# Altium PCB MT2492_PCB.PcbDoc
Units mm, origin at the board's own origin, x right, y up, seen from the top; angles counter-clockwise.
Board outline 36 x 20.7 mm, 2 copper layers (Top Layer, Bottom Layer); 15 components, 9 nets, 34 pads, 10 vias.
Unrouted connection lines stored in the file: 25.
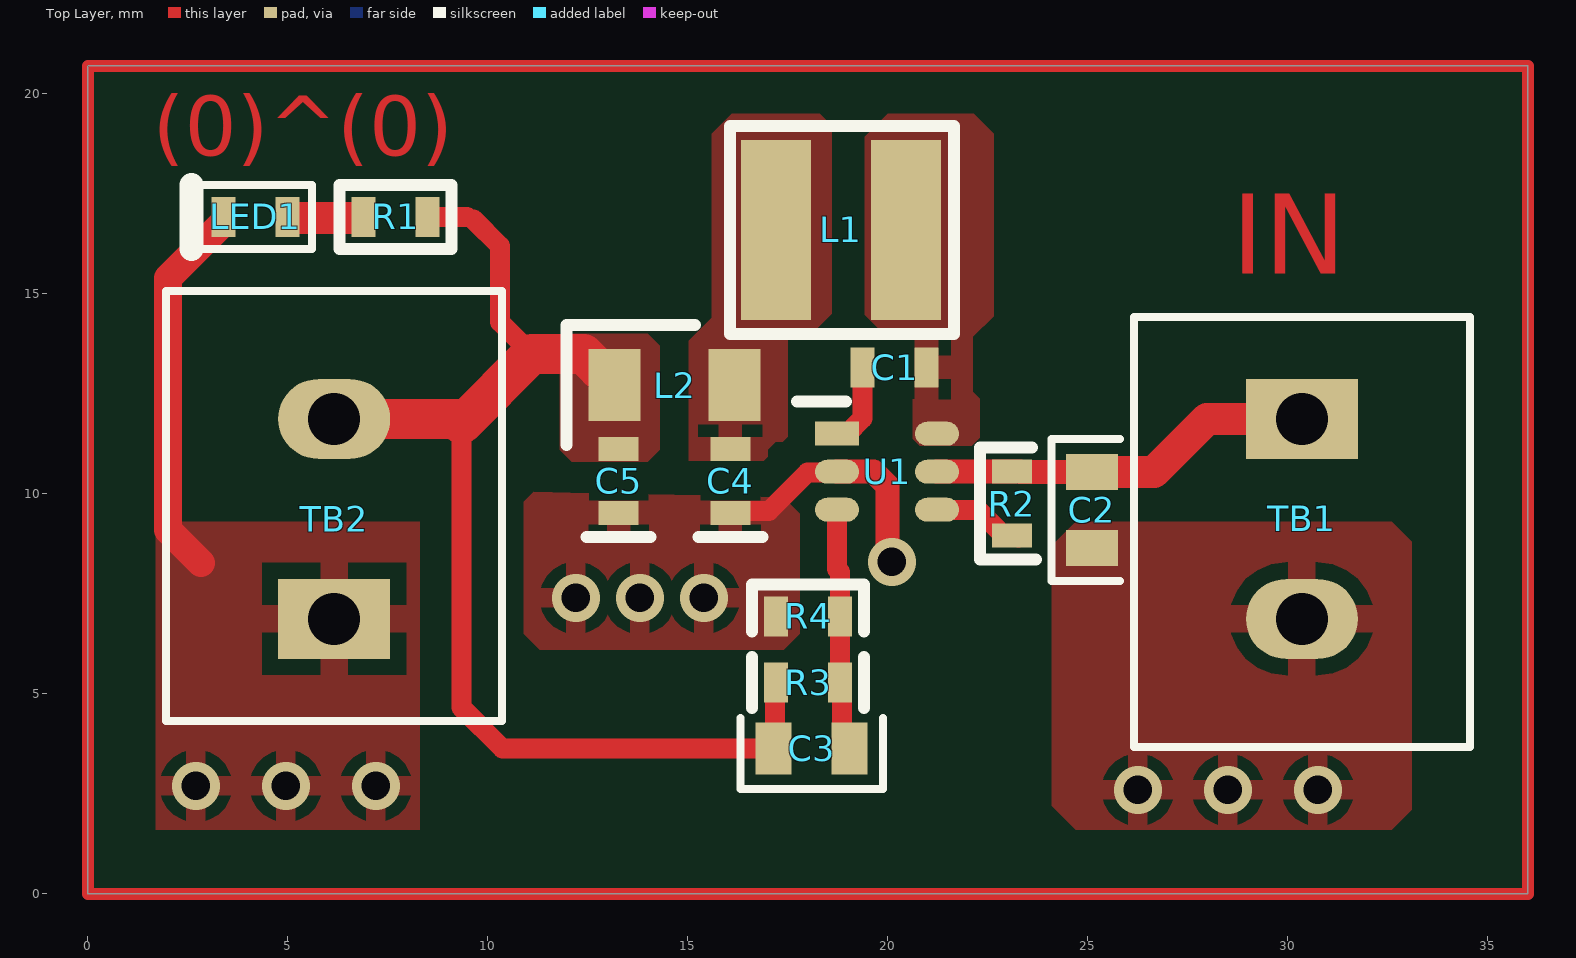
[diagram p0: Top Layer view]
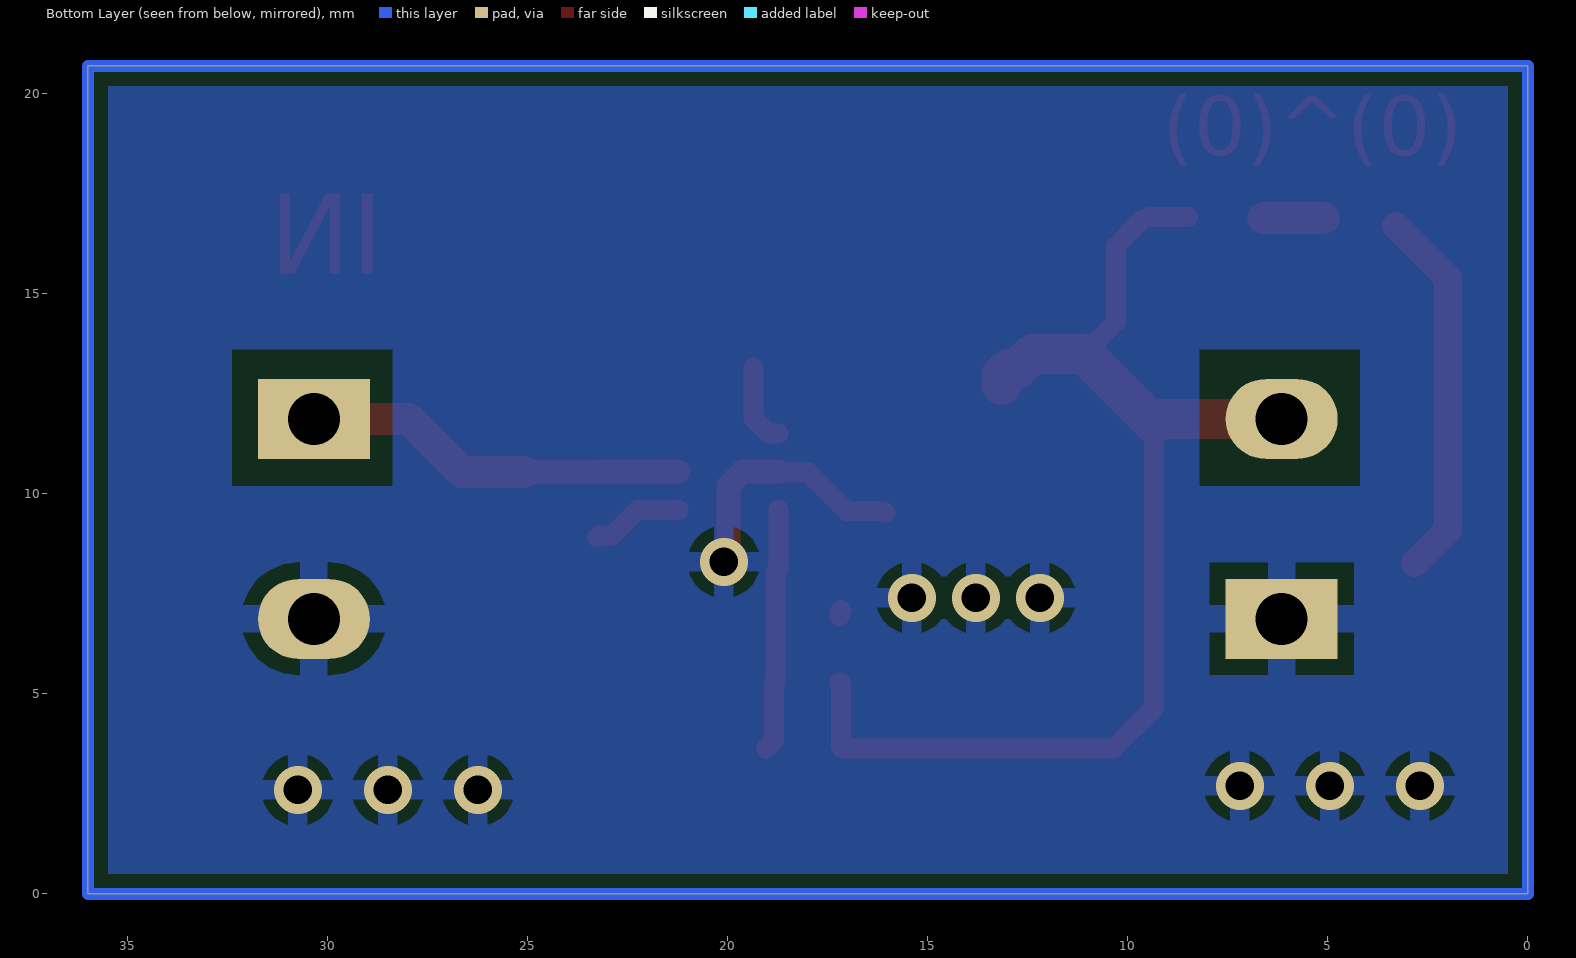
[diagram p1: Bottom Layer view, seen from below]
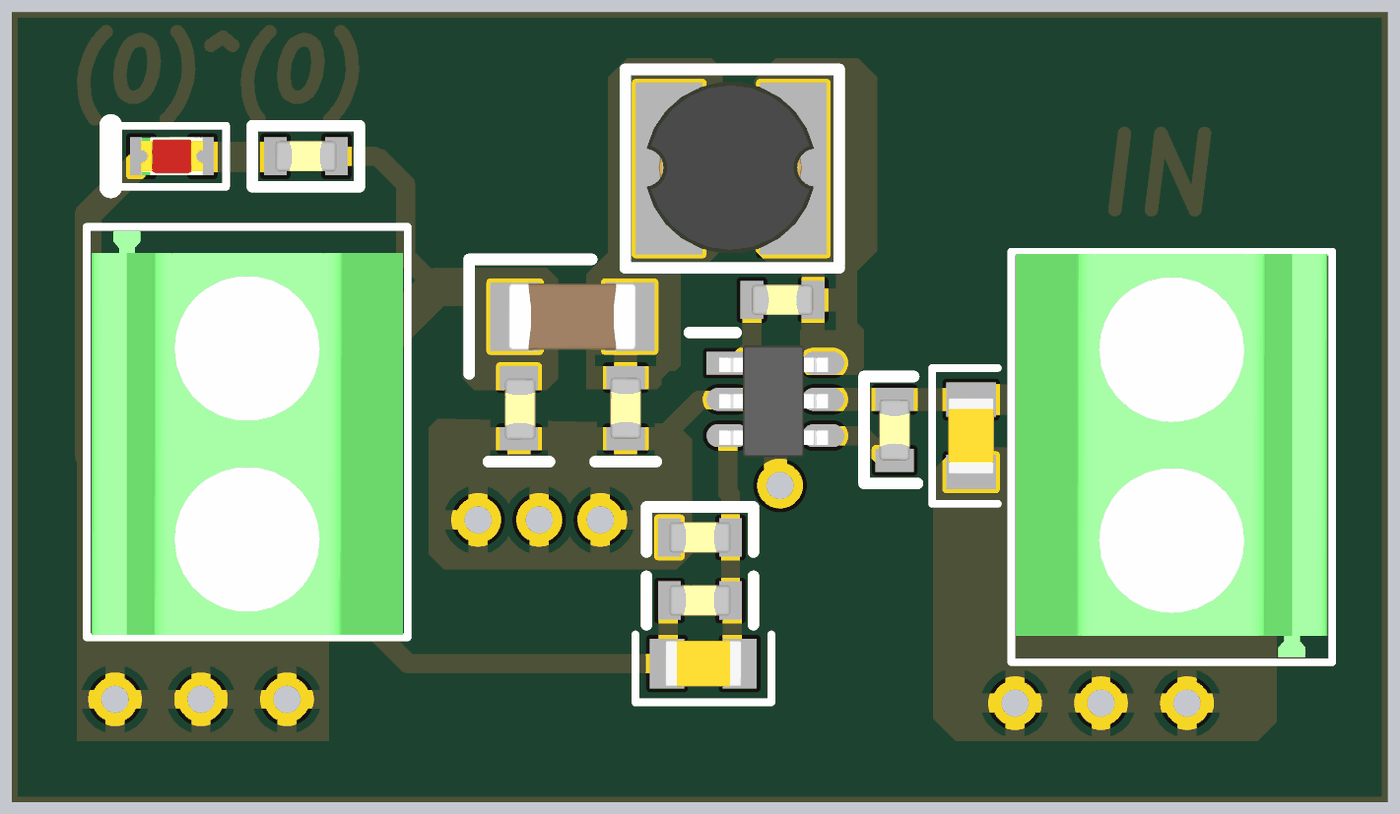
[diagram p2: 3D render of the assembled board from above, using the file's embedded part models]

## Layer stack, top to bottom
Top Solder: solder mask 0.0102, Solder Resist, Dk 3.5
Top Layer: signal copper 0.0356
Dielectric 1: dielectric 0.32, FR-4, Dk 4.8
Bottom Layer: signal copper 0.0356
Bottom Solder: solder mask 0.0102, Solder Resist, Dk 3.5

## Board outline
0,0 36,0 36,20.7 0,20.7

## Design rules (kind name [scope] priority, off if disabled: settings)
BoardOutlineClearance [All] p1: gap=0.5 ignorepadtopadclearanceinfootprint=FALSE
Clearance [All] p1: gap=0.3 ignorepadtopadclearanceinfootprint=FALSE
PolygonConnect [All] p1: thpad.connectstyle=Relief thpad.reliefconductorwidth=0.7 thpad.reliefentries=4 thpad.polygonreliefangle="90 Angle" thpad.airgapwidth=0.4 smdpad.connectstyle=Direct smdpad.reliefconductorwidth=0.254 smdpad.reliefentries=4 smdpad.polygonreliefangle="90 Angle" smdpad.airgapwidth=0.254 via.connectstyle=Relief via.reliefconductorwidth=0.5 via.reliefentries=4 via.polygonreliefangle="90 Angle" via.airgapwidth=0.3
RoutingVias [All] p1: holewidth=0.7 width=1.3 viastyle="Through Hole" minholewidth=0.6 minwidth=1.2 maxholewidth=0.8 maxwidth=1.4
SolderMaskExpansion [All] p1: expansion=0.102 istentingtop=FALSE
Width [All] p1: maxlimit=2 minlimit=0.3 preferedwidth=0.5
30 further rules are at their usual default settings.

## Components (designator, comment, footprint, x,y, rotation, side; value= is the part's Value field where it differs from the comment)
C1 "0603_22n" 0603_CAP 19.365,13.162 r0 top
C2 "0805_100u" "C0805 - 0.1uf" 25.1,9.6 r90 top
C3 "0805_47p" "C0805 - 0.1uf" 18.095,3.637 r180 top
C4 "0603_22u" 0603_CAP 16.063,9.525 r90 top
C5 "0603_22uF" 0603_CAP 13.269,9.525 r90 top
L1 "CD43_22u" CD43 20.45,16.6 r90 top
L2 "1206_1u" 1206 14.666,12.723 r180 top
LED1 "0603_Red" 0603_LED 4.989,16.925 r180 top
R1 "0603_R" 0603_CAP 6.894,16.925 r0 top
R2 "0603_R" 0603_CAP 23.1,8.956 r90 top
R3 "0603_110k" 0603_CAP 18.806,5.288 r180 top
R4 "0603_15k" 0603_CAP 17.206,6.939 r0 top
TB1 "TERM 1x2 5mm" Terminal_5mm 30.35,9.375 r0 top
TB2 "TERM 1x2 5mm" Terminal_5mm 6.157,9.375 r180 top
U1 "MT2492" SOT23-6 18.73,11.506 r0 top

## Footprints (in the part's own frame and the unit in brackets; to place one, negate y for a bottom-side part, rotate by r counter-clockwise, add the part's x,y. Pads: shape width x height; smd on the part's side, far side on the other; paste and mask are expansions set on the pad)
0603_CAP [mm]
  rect 0.6x1 smd: 1(0,0) 2(1.6,0)
  body extent 0,-0.4 1.6,0.4, height 0.81
0603_LED [mm]
  rect 0.6x1 smd: 1(0,0) 2(1.6,0)
  silkscreen extent -0.62,-0.8 2.4,0.8, body extent -0.01,-0.5 1.61,0.5, height 0.98
1206 [mm]
  rect 1.3x1.8 smd: 1(-1.5,0) 2(1.5,0)
  silkscreen extent -0.51,-1.5 2.7,1.5, body extent -1.67,-0.87 1.68,0.87, height 1
"C0805 - 0.1uf" [mm]
  rect 0.9x1.3 smd: 1(-0.95,0) 2(0.95,0)
  silkscreen extent -1.78,-0.7 1.78,1.02, body extent -1,-0.6 1,0.6, height 0.96
CD43 [mm]
  rect 4.5x1.75 smd: 1(0,0) 2(0,3.25)
  silkscreen extent -2.6,-1.2 2.6,4.4, body extent -2.22,-0.54 2.28,3.84, height 3.21
SOT23-6 [mm]
  rect 1.1x0.6 smd: 1(0,0)
  oval 1.1x0.6 smd: 2(0,-0.95) 3(0,-1.9) 4(2.5,-1.9) 5(2.5,-0.95) 6(2.5,0)
  silkscreen extent -1,0.8 0.22,0.8, body extent -0.22,-2.46 2.62,0.46, height 1.15
Terminal_5mm [mm]
  rect 2.8x2 hole 1.3: 1(0,2.5)
  oval 2.8x2 hole 1.3: 2(0,-2.5)
  silkscreen extent -4.2,-5.7 4.2,5.05, body extent -4.08,-5.58 4.07,4.98, height 10.01

## Part data
C1 C4 C5: library part "0603 Capacitor"
C2 C3: library part "0805 Capacitor", "0805 Capacitor"
L1 L2: library part ILSB1206ER100K, "Inductor RF Chip Shielded Multi-Layer 10uH 10% 2MHz 45Q-Factor 0.025A 1Ohm DCR 1206 T/R", Case Code (Imperial)=1206, Case Code (Metric)=3216, Current Rating=25mA, DC Resistance (DCR)=1R, Inductance=10uH, Inductance Tolerance=10%, Manufacturer 1="Vishay Dale", Max Operating Temperature=125°C, Min Operating Temperature=-55°C, Package Quantity=3000, Self Resonant Frequency=28MHz, Supplier Part Number 1=70-ILSB1206ER100K, Test Frequency=2MHz, Case/Package=1206, ComponentLink1Description=https://datasheet.ciiva.com/1067/ilsb1206-1067856.pdf?src-supplier=Digi-Key, ComponentLink1URL=https://datasheet.ciiva.com/1067/ilsb1206-1067856.pdf?src-supplier=Digi-Key, ComponentLink2Description=https://datasheet.ciiva.com/7243/1537078-7243341.pdf?src-supplier=Newark, ComponentLink2URL=https://datasheet.ciiva.com/7243/1537078-7243341.pdf?src-supplier=Newark, ComponentLink3Description=https://datasheet.ciiva.com/3867/ilsb1206-3867119.pdf?src-supplier=Arrow+Electronics, ComponentLink3URL=https://datasheet.ciiva.com/3867/ilsb1206-3867119.pdf?src-supplier=Arrow+Electronics, Core Material=Ferrite, DC Current=25mA, Depth=1.8mm, Height=0.02inch, Height - Seated (Max)=0.055inch, Lead Free="Lead Free", Length=0.126inch, Manufacturer Part Number 1=ILSB1206ER100K, Max DC Current=25mA, Military Standard=Not, Mount="Surface Mount", Packaging="Tape and Reel", Pricing 1="1=0.23, 10=0.204, 50=0.204, 100=0.137, 1000=0.096, 10000=0.072 (USD)", Q Factor=45, Radiation Hardening=No, Rated Current-Max=25mA, Reach SVHC Compliant=Unknown, RoHS=Yes, RoHS Compliant=Yes, Series=ILSB-1206, Shielding=Shielded, Stock 1=11113, Supplier 1=Mouser, Termination=SMD/SMT, Tolerance=10%, Width=0.063inch
LED1: library part 0603LED
R1 R2 R3 R4: library part "0603 Resistor"
TB1 TB2: library part "Terminal BLK Green", "PHOENIX CONTACT         MKDSN 1,5/ 2             Wire-To-Board Terminal Block, 5 mm, 2 Ways, 26 AWG, 16 AWG, 1.5 mm, Screw", Color=Green, Current=10A, Current Rating=13.5A, Flammability Rating="UL94 V-0", Manufacturer 1="Phoenix Contact", Manufacturer Part Number 1=1729018, Max Supply Voltage=250V, Package Quantity=50, Supplier Part Number 1=651-1729018, Voltage=300V, Voltage Rating=400V, Approvals=UL,CSA,cULus,CB, ComponentLink1Description=https://datasheet.ciiva.com/16071/1729018-16071814.pdf?src-supplier=Onlinecomponents.com, ComponentLink1URL=https://datasheet.ciiva.com/16071/1729018-16071814.pdf?src-supplier=Onlinecomponents.com, ComponentLink2Description=https://datasheet.ciiva.com/832/1729018-832055.pdf?src-supplier=Digi-Key, ComponentLink2URL=https://datasheet.ciiva.com/832/1729018-832055.pdf?src-supplier=Digi-Key, ComponentLink3Description=https://datasheet.ciiva.com/15169/getdatasheetpartid-177860-15169643.pdf?src-supplier=Verical, ComponentLink3URL=https://datasheet.ciiva.com/15169/getdatasheetpartid-177860-15169643.pdf?src-supplier=Verical, ComponentLink4Description=https://datasheet.ciiva.com/14607/70054375-14607356.pdf?src-supplier=Allied+Electronics, ComponentLink4URL=https://datasheet.ciiva.com/14607/70054375-14607356.pdf?src-supplier=Allied+Electronics, ComponentLink5Description=https://datasheet.ciiva.com/33105/1729018-33105978.pdf?src-supplier=Today+Components, ComponentLink5URL=https://datasheet.ciiva.com/33105/1729018-33105978.pdf?src-supplier=Today+Components, Connector Type=Screw, Contact Material=Tin, Depth=8.1mm, Gender=Male, Height=13.5mm, Housing Color=Green, Housing Material=Polyamide, Insulation Material=Nylon, Lead Free="Lead Free", Length=8.1mm, Material=Polyamide, Max Current Rating=13.5A, Mount="Through Hole", Number of Circuits=2, Number of Contacts=2, Number of Levels=1, Number of Pins=2, Number of Poles=2, Number of Positions=2, Number of Positions Per Level=2, Number of Rows=1, Orientation=Straight, Parameter Name 1=Bulk, Pitch=5mm, Pricing 1="1=1.10000, 10=1.05000, 50=1.01000, 100=0.97400, 250=0.91000, 500=0.83800 (USD)", Radiation Hardening=No, REACH SVHC=Unknown, RoHS=Yes, Stock 1=6371, Stripping Length=6mm, Supplier 1=Mouser, Termination=Screw, Weight=0.06949oz, Width=13.5mm, Wire Gauge (Max)=26AWG, Wire Gauge (Min)=26AWG, Wire/Cable Gauge=26AWG
U1: "2A Buck Converter"

## Via types
v1: diameter 1.2, hole 0.711, Top Layer to Bottom Layer, 10 vias

## Nets (pads, with @x,y where several pads share a name; then routed paths per layer and width w, separated by ;. In a path a pad name is that pad's centre, name@x,y a point inside that pad or via, vN(x,y) a via of type N, cw(c..) or ccw(c..) an arc to the next point about the centre after c; other vN are vias at no path point)
BS: C1.1 U1.1 | length 2.1
  Top Layer w0.5: U1.1 18.98,11.506 19.365,11.891 C1.1
EN: R2.1 U1.4 | length 2.3
  Top Layer w0.5: U1.4 21.236,9.6 22.256,9.6 22.9,8.956 R2.1 23.217,8.956 R2.1@23.267,8.906
FB: C3.1 R3.1 R4.2 U1.3 | length 6.1
  Top Layer w0.5: U1.3 18.73,8.12 18.806,8.044 R4.2 R3.1 ; R3.1@18.85,5.288 18.85,3.832 C3.1
GND: C2.1 C4.1 C5.1 LED1.2 R4.1 TB1.2 TB2.1 U1.2 | length 15.9
  Top Layer w0.5: C4.1 16.113,9.575 17.029,9.575 17.991,10.537 18.711,10.537 U1.2 ; R4.1@17.156,7.1 17.206,7.05 R4.1
  Top Layer w0.6: U1.2 19.634,10.556 19.985,10.205 19.985,8.415 v1(20.1,8.3)
  Top Layer w0.7: 2.822,8.278 2,9.1 2,15.4 LED1.2@3.3,16.7
  other v1: 26.25,2.6 28.5,2.6 30.75,2.6 2.7,2.7 4.95,2.7 7.2,2.7 12.2,7.4 13.8,7.4 15.4,7.4
NetLED1_1: LED1.1 R1.1 | length 1.5
  Top Layer w0.8: LED1.1@5.114,16.9 R1.1@6.614,16.9
SW: C1.2 L1.1 U1.6
V_in: C2.2 R2.2 TB1.1 U1.5 | length 9.7
  Top Layer w0.6: U1.5 R2.2 23.3,10.556 23.306,10.55 C2.2
  Top Layer w0.8: C2.2 26.65,10.55 27.975,11.875 TB1.1
V_OUT: C3.2 C5.2 L2.2 R1.2 R3.2 TB2.2 | length 30
  Top Layer w0.5: R1.2 9.475,16.925 ; 9.343,11.743 9.343,4.657 10.363,3.637 C3.2 17.176,3.668 17.176,5.258 R3.2 ; 9.635,16.865 10.3,16.2 10.3,14.3 11.1,13.5
  Top Layer w1: TB2.2 9.211,11.875 ; 9.343,11.743 11.1,13.5 12.389,13.5 12.766,13.123 13.016,13.123 13.166,12.973 L2.2
Vo_Raw: C4.2 L1.2 L2.1
copper on no net: | length 226.8
  Top Layer w0.3: 0,0 0,1.2 0,20.7 36,20.7 36,1.2 36,0 0,0
  Bottom Layer w0.3: 0,0 0,1.2 0,20.7 36,20.7 36,1.2 36,0 0,0

## Polygon pours and split planes (outlines as drawn)
Vo_Raw on Top Layer "Top Layer-Vo_Raw" (solid, pour order 10): 18.1,14 18.6,14.5 18.6,19.2 18.3,19.5 16.1,19.5 15.6,19 15.6,14.4 15.025,13.825 15.025,10.825 16.901,10.825 17,10.924 17,11.1 17.2,11.3 17.376,11.3 17.5,11.424 17.5,14
SW on Top Layer "SW_L01_P000" (solid, pour order 0): 20,19.5 19.425,18.925 19.425,14.475 19.939,13.961 20.362,13.961 20.625,13.698 20.625,11.375 20.8,11.2 22.1,11.2 22.3,11.4 22.3,12.375 22.124,12.551 22.124,13.924 22.642,14.442 22.642,19.004 22.146,19.5
GND on Top Layer "GND_L01_P011" (solid, pour order 11): 1.7,9.3 1.7,1.6 8.3,1.6 8.3,9.3
GND on Top Layer "GND_L01_P009" (solid, pour order 9): 24.1,2.2 24.7,1.6 32.6,1.6 33.1,2.1 33.1,8.8 32.6,9.3 24.7,9.3 24.1,8.7
V_OUT on Top Layer "V_OUT_L01_P007" (solid, pour order 7): 14,10.8 14.3,11.1 14.3,13.7 14,14 12.1,14 11.8,13.7 11.8,11.1 12.1,10.8
GND on Top Layer "GND_L01_P003" (solid, pour order 3): 11.15,10.05 10.9,9.8 10.9,6.5 11.3,6.1 17.4,6.1 17.8,6.5 17.8,9.5 17.377,9.923
GND on Bottom Layer "GND_L02_P012" (solid, pour order 12): 0,-1.9 0,20.7 36,20.7 36,-1.9

## Other copper
Top Layer:
  text "(0)^(0)" at 1.626,18.45 h1.5
  text "IN" at 28.6,15.5 h2
Bottom Layer:
  pour cut-out: 28.393,10.2 32.393,10.2 32.393,13.6 28.393,13.6
  pour cut-out: 4.2,10.2 8.2,10.2 8.2,13.6 4.2,13.6

## Silkscreen, mask and mechanical layers (free items; w line width, h text height)
Mechanical 2:
  lines w0.3: 4.2,10.2 8.2,10.2 8.2,13.6 6.2,13.6 4.2,13.6 4.2,10.2